# Altium PCB ConcentratorInOne.PcbDoc
Units mil, origin at the board's own origin, x right, y up, seen from the top; angles counter-clockwise.
Board outline 6309.49 x 3868.94 mil, 2 copper layers (Top Layer, Bottom Layer); 142 components, 105 nets, 460 pads, 60 vias.
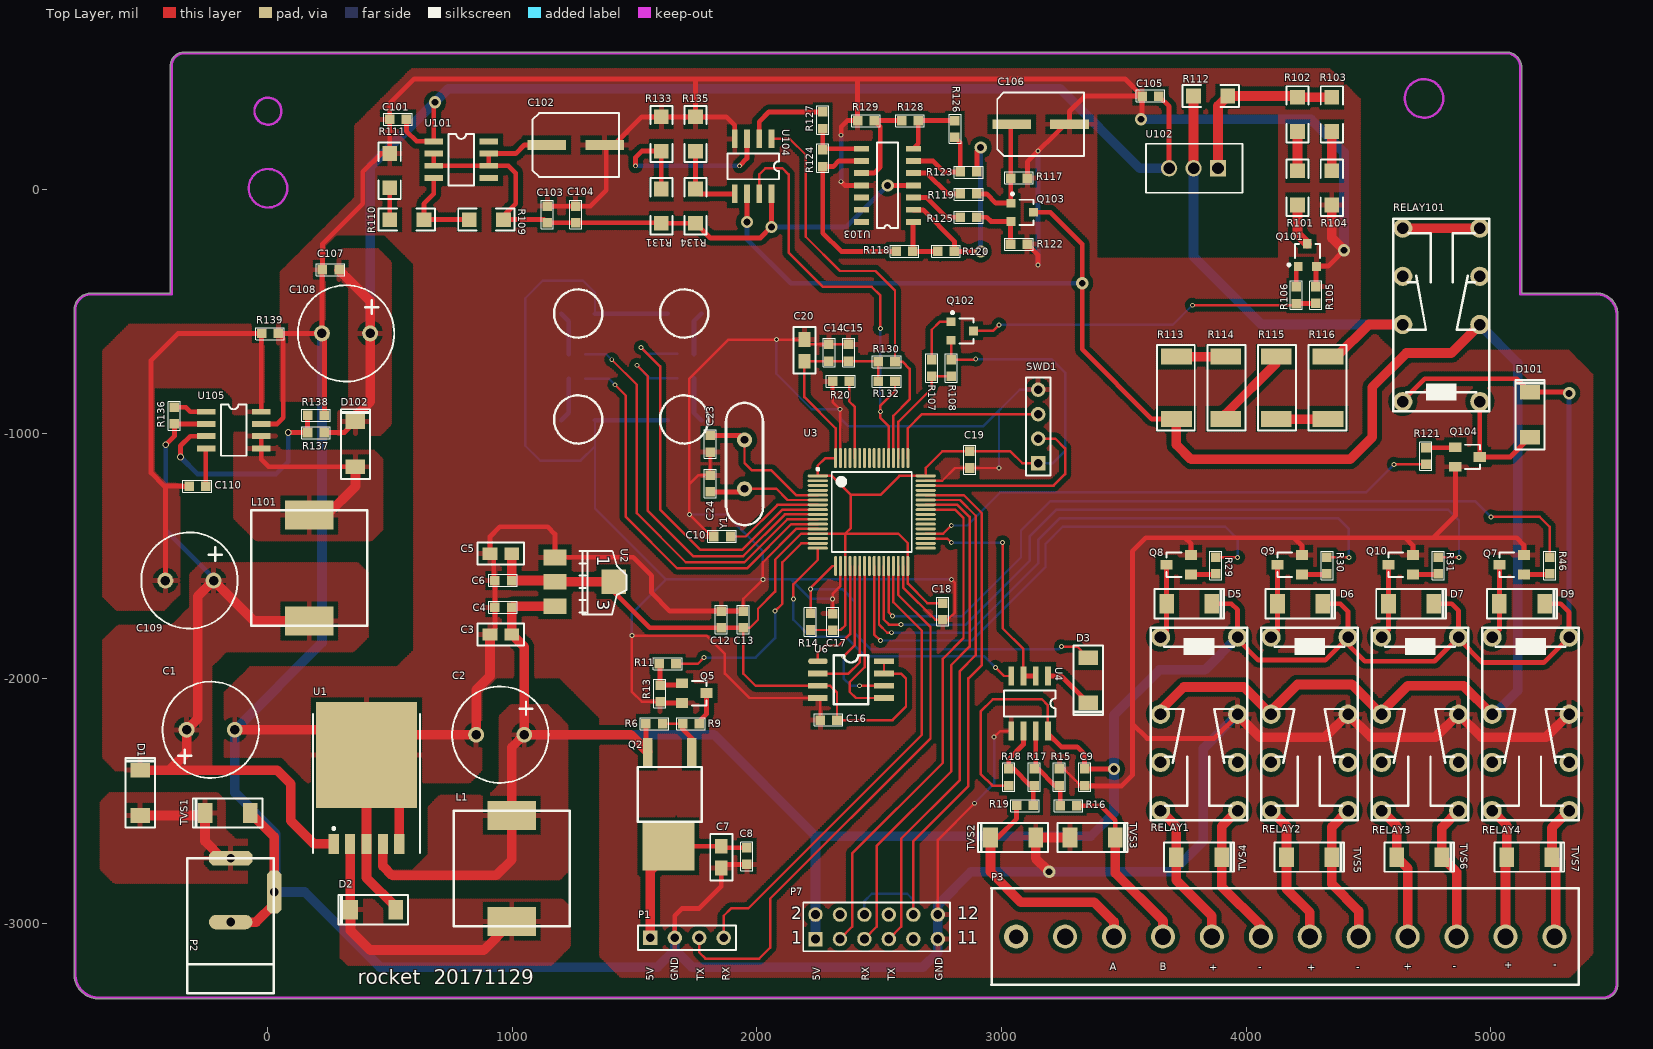
[diagram p0: Top Layer view]
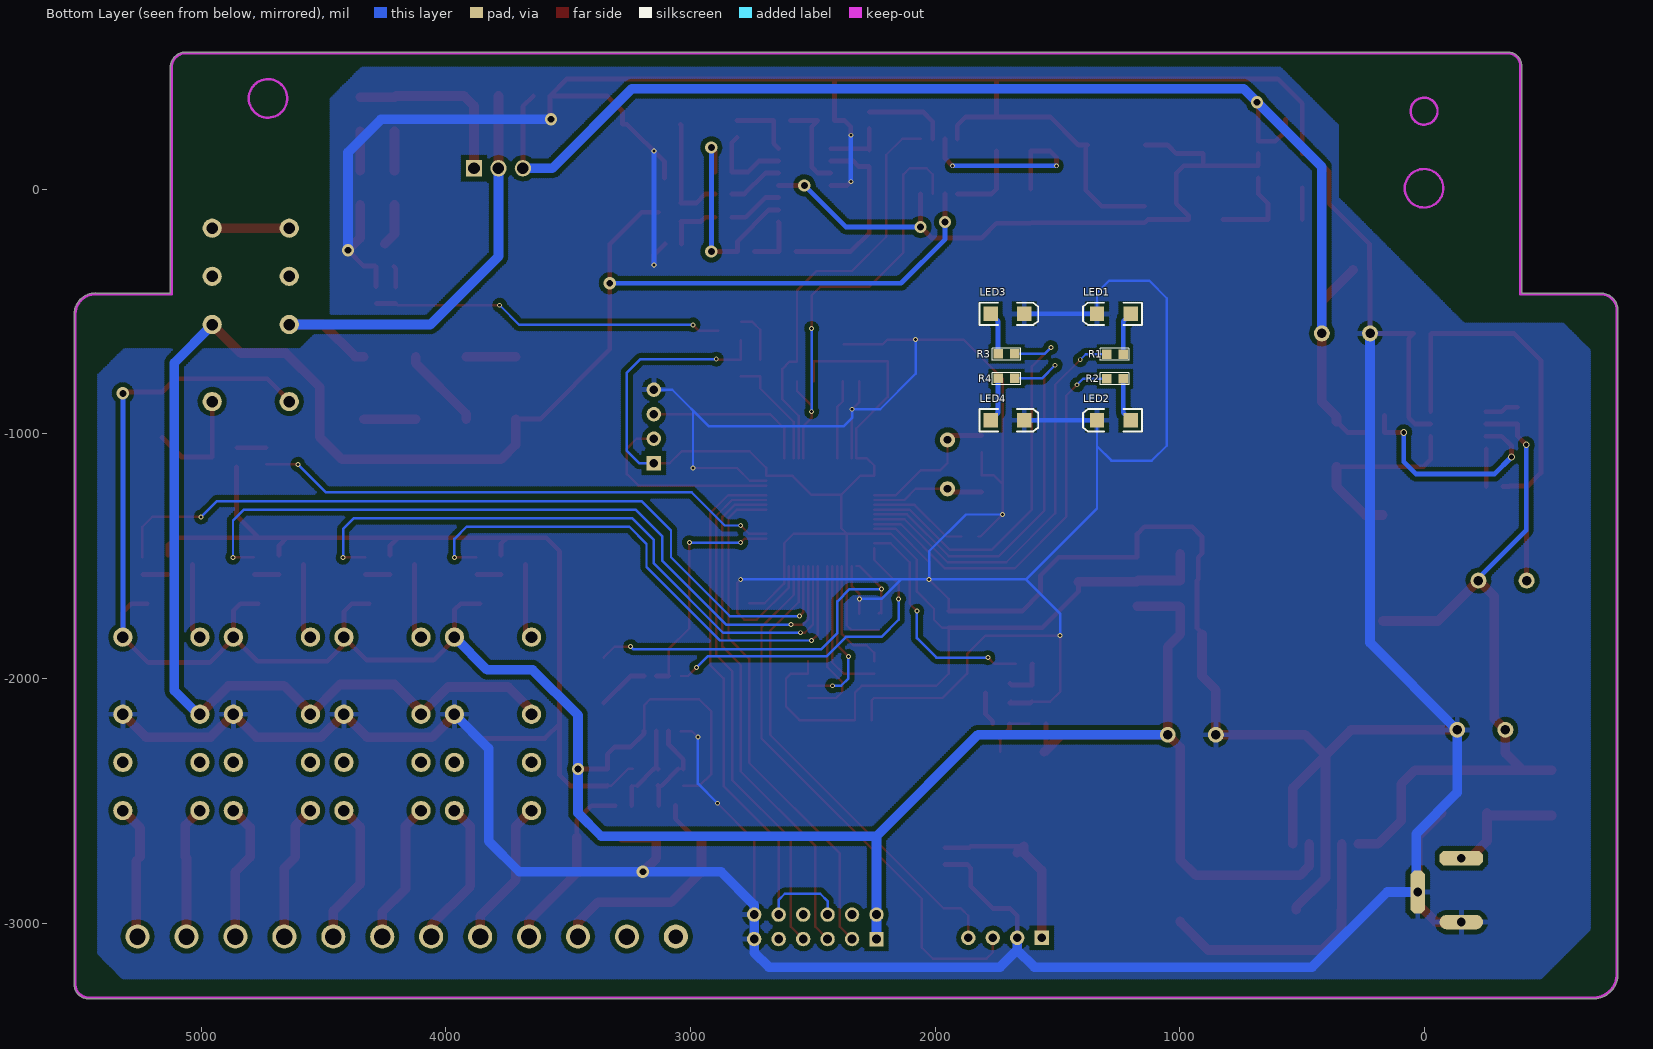
[diagram p1: Bottom Layer view, seen from below]

## Layer stack, top to bottom
Top Layer: signal copper 1.4
Dielectric: dielectric 12.6, FR-4, Dk 4.8
Bottom Layer: signal copper 1.4

## Board outline
-790.01,-495 cw(c-719.94,-494.94) -790.01,-494.94 cw(c-719.94,-494.94) -790.01,-494.86 cw(c-719.94,-494.94) -720,-424.87 cw(c-720,-429.88) -719.11,-424.95 -396.24,-424.95 -396.24,503.07 cw(c-391.3,503.07) -396.18,503.83 cw(c-391.3,505) -396.31,505.1 cw(c-340.96,504.04) -339.96,559.39 cw(c-340.96,504.04) -339.9,559.38 -340,559.39 5055.83,559.39 cw(c5063.39,497.76) 5124.65,507.83 cw(c5120.51,505) 5125.53,505 5125.53,-424.87 5429.94,-424.87 cw(c5432.05,-512.05) 5434.21,-424.87 ccw(c5434.09,-429.88) 5434.09,-424.87 5434.22,-424.87 cw(c5432.05,-512.05) 5519.23,-509.87 cw(c5514.21,-510) 5519.23,-510 5519.23,-3244.45 cw(c5460.16,-3249.84) 5519.47,-3249.84 cw(c5460.16,-3249.84) 5454.77,-3308.91 -684.85,-3308.91 cw(c-690.55,-3209.45) -790.01,-3215.29 cw(c-785,-3215) -790.01,-3215 -790.01,-494.88 cw(c-785,-494.88)

## Design rules (kind name [scope] priority, off if disabled: settings)
Clearance Clearance_1 [inpolygon] p1: gap=20
Clearance [All] p2: gap=7.87
ComponentClearance [All] p1: gap=10 collisioncheckmode=3 verticalgap=10
PolygonConnect PolygonConnect_1 [isvia] p1: connectstyle=Direct reliefconductorwidth=10 reliefentries=4 polygonreliefangle="90 Angle"
PolygonConnect [All] p2: connectstyle=Relief reliefconductorwidth=20 reliefentries=4 polygonreliefangle="90 Angle"
RoutingVias [All] p1: holewidth=16 width=32 viastyle="Through Hole" minholewidth=12 minwidth=20 maxholewidth=70 maxwidth=120
SolderMaskExpansion [All] p1: expansion=4
TestPointUsage FabricationTestPointUsage [All] p1: valid=0 allowmultiple=FALSE
Testpoint FabricationTestpoint [All] p1: side=3 testpointundercomponent=TRUE minsize=40 maxsize=100 preferedsize=60 minholesize=0 maxholesize=40 preferedholesize=32 testpointgrid=1 style=297 order=0123456789
Width [All] p1: maxlimit=100 minlimit=7.87 preferedwidth=10 toplayer_minwidth=9.84 bottomlayer_minwidth=9.84 minimp=50.000000 maximp=50.000000 favimp=50.000000
18 further rules are at their usual default settings.

## Classes and differential pairs
component class JunPuMBUS: C101 C102 C103 C104 C105 C106 C107 C108 C109 C110 D101 D102 L101 Q101 Q102 Q103 Q104 R101 R102 R103 R104 R105 R106 R107 R108 R109 R110 R111 R112 R113 R114 R115 R116 R117 R118 R119 R120 R121 R122 R123 R124 R125 R126 R127 R128 R129 R130 R131 R132 R133 R134 R135 R136 R137 R138 R139 RELAY101 U101 U102 U103 U104 U105
component class Concentrator: C1 C2 C3 C4 C5 C6 C7 C8 C9 C10 C12 C13 C14 C15 C16 C17 C18 C19 C20 C23 C24 D1 D2 D3 D5 D6 D7 D9 L1 LED1 LED2 LED3 LED4 P1 P2 P3 P7 Q2 Q5 Q7 Q8 Q9 Q10 R1 R2 R3 R4 R6 R9 R11 R13 R14 R15 R16 R17 R18 R19 R20 R29 R30 R31 R46 RELAY1 RELAY2 RELAY3 RELAY4 SWD1 TVS1 TVS2 TVS3 TVS4 TVS5 TVS6 TVS7 U1 U2 U3 U4 U6 Y1

## Components (designator, comment, footprint, x,y, rotation, side; value= is the part's Value field where it differs from the comment)
C1 "Cap Pol1" "C_DJ - duplicate" -330,-2210 r180 top
C2 "Cap Pol1" "C_DJ - duplicate" 1050,-2230 r0 top
C3 "Cap" 0805 910,-1820 r0 top
C4 "Cap" 0603 930,-1710 r180 top
C5 "Cap" 0805 910,-1490 r0 top
C6 "Cap" 0603 930,-1600 r180 top
C7 "Cap" 0805 1855,-2775 r90 top
C8 "Cap" 0603 1960,-2760 r270 top
C9 "Cap" 0603 3340,-2370 r90 top
C10 "Cap" 0603 1825,-1420 r180 top
C12 "Cap" 0603 1855,-1725 r90 top
C13 "Cap" 0603 1945,-1725 r90 top
C14 "Cap" 0603 2295,-635 r90 top
C15 "Cap" 0603 2375,-635 r90 top
C16 "Cap" 0603 2260,-2170 r180 top
C17 "Cap" 0603 2310,-1735 r90 top
C18 "Cap" 0603 2760,-1760 r270 top
C19 "Cap" 0603 2870,-1140 r270 top
C20 "Cap" 0805 2195,-615 r270 top
C23 "Cap" 0603 1810,-1075 r270 top
C24 "Cap" 0603 1810,-1170 r90 top
C101 "Cap" 0603 500,285 r180 top
C102 "Cap Pol3" C_6.3_5.3 1260,180 r0 top
C103 "Cap" 0603 1144.21,-70 r90 top
C104 "Cap" 0603 1260,-70 r90 top
C105 "Cap" 0603 3575,380 r180 top
C106 "Cap Pol3" C_6.3_5.3 3160,265 r0 top
C107 "Cap" 0603 225,-330 r180 top
C108 "Cap Pol1" "C_DJ - duplicate" 420,-590 r0 top
C109 "Cap Pol1" "C_DJ - duplicate" -220,-1600 r0 top
C110 "Cap" 0603 -320,-1215 r180 top
D1 "Diode 1N4007" M7-4007 -520,-2560 r90 top
D2 "SS34" M7-4007 525,-2945 r180 top
D3 "M7" M7-4007 3355,-1915 r270 top
D5 "M7" M7-4007 3675,-1695 r0 top
D6 "M7" M7-4007 4128.33,-1695 r0 top
D7 "M7" M7-4007 4581.67,-1695 r0 top
D9 "M7" M7-4007 5035,-1695 r0 top
D101 "M7" M7-4007 5160,-1015 r90 top
D102 "SS34" M7-4007 360,-1135 r90 top
L1 "Inductor" L12*12 1235,-2540 r180 top
L101 "Inductor" L12*12 -65,-1785 r0 top
LED1 "LED2" 3.2X1.6X1.1 1270,-510 r0 bottom
LED2 "LED2" 3.2X1.6X1.1 1270,-945 r0 bottom
LED3 "LED2" 3.2X1.6X1.1 1705,-510 r180 bottom
LED4 "LED2" 3.2X1.6X1.1 1705,-945 r180 bottom
P1 "Header 4" HDR1X4 1565,-3060 r0 top
P2 "Header 2" POWER_SOCK -150,-2735 r270 top
P3 "Header 12" P12 3060,-3055 r0 top
P7 "Header 6X2" HDR2X6 2240,-3065 r0 top
Q2 "PMOS-2" 78M05/20 1735,-2300 r180 top
Q5 "2N3904" NPN-PNP 1695,-2020 r270 top
Q7 "2N3904" NPN-PNP 5135,-1575 r90 top
Q8 "2N3904" NPN-PNP 3775,-1575 r90 top
Q9 "2N3904" NPN-PNP 4228.33,-1575 r90 top
Q10 "2N3904" NPN-PNP 4681.67,-1575 r90 top
Q101 "NPN" SOT-23 4250,-270 r0 top
Q102 "PNP" SOT-23 2840,-580 r270 top
Q103 "BAW56" SOT-23 3085,-95 r270 top
Q104 "2N3904" NPN-PNP 4855,-1055 r270 top
R1 "Res2" 0603 1300,-675 r0 bottom
R2 "Res2" 0603 1300,-775 r0 bottom
R3 "Res2" 0603 1675,-674 r180 bottom
R4 "Res2" 0603 1675,-774 r180 bottom
R6 "Res2" 0603 1615,-2185 r0 top
R9 "Res2" 0603 1765,-2185 r0 top
R11 "Res2" 0603 1670,-1940 r0 top
R13 "Res2" 0603 1605,-2095 r270 top
R14 "Res2" 0603 2220,-1802 r270 top
R15 "Res2" 0603 3236.67,-2370 r90 top
R16 "Res2" 0603 3240,-2520 r180 top
R17 "Res2" 0603 3133.33,-2370 r90 top
R18 "Res2" 0603 3030,-2370 r90 top
R19 "Res2" 0603 3130,-2519 r0 top
R20 "Res2" 0603 2310,-786 r180 top
R29 "Res2" 0603 3875,-1505 r90 top
R30 "Res2" 0603 4330,-1505 r90 top
R31 "Res2" 0603 4785,-1505 r90 top
R46 "Res2" 0603 5240,-1505 r90 top
R101 "Res1" 1206 4210,5 r270 top
R102 "Res1" 1206 4210,305 r270 top
R103 "Res1" 1206 4350,305 r90 top
R104 "Res1" 1206 4350,5 r90 top
R105 "Res1" 0603 4285,-467 r270 top
R106 "Res1" 0603 4205,-400 r90 top
R107 "Res1" 0603 2715,-765 r270 top
R108 "Res1" 0603 2795,-765 r270 top
R109 "Res1" 1206 895,-125 r180 top
R110 "Res1" 1206 570,-125 r180 top
R111 "Res1" 1206 500,75 r90 top
R112 "Res1" 1206 3855,380 r0 top
R113 "Res1" 2512 3715,-940.12 r90 top
R114 "Res1" 2512 3916.67,-685 r270 top
R115 "Res1" 2512 4123.33,-685 r270 top
R116 "Res1" 2512 4335,-940.12 r90 top
R117 "Res1" 0603 3038,45 r180 top
R118 "Res1" 0603 2570,-255 r180 top
R119 "Res1" 0603 2900,-20 r0 top
R120 "Res1" 0603 2740,-255 r180 top
R121 "Res2" 0603 4735,-1125 r270 top
R122 "Res1" 0603 3105,-225 r0 top
R123 "Res1" 0603 2900,70 r0 top
R124 "Res1" 0603 2270,160 r90 top
R125 "Res1" 0603 2900,-115 r0 top
R126 "Res1" 0603 2810,280 r90 top
R127 "Res1" 0603 2270,315 r90 top
R128 "Res1" 0603 2660,280 r0 top
R129 "Res1" 0603 2480,280 r0 top
R130 "Res1" 0603 2565,-705 r0 top
R131 "Res1" 1206 1610,-70 r90 top
R132 "Res1" 0603 2565,-785 r0 top
R133 "104(Good)" 1206 1610,225 r90 top
R134 "Res1" 1206 1750,-70 r90 top
R135 "Res1" 1206 1750,225 r90 top
R136 "Res2" 0603 -380,-960 r270 top
R137 "Res2" 0603 232,-995 r0 top
R138 "Res2" 0603 165,-925 r180 top
R139 "Res2" 0603 45,-590 r0 top
RELAY1 "Relay-DPDT" Relay-DPDP 3965,-2540 r180 top
RELAY2 "Relay-DPDT" Relay-DPDP 4416.67,-2540 r180 top
RELAY3 "Relay-DPDT" Relay-DPDP 4868.33,-2540 r180 top
RELAY4 "Relay-DPDT" Relay-DPDP 5320,-2540 r180 top
RELAY101 "Relay-DPDT" Relay-DPDP 4640,-160 r0 top
SWD1 "SWD" HDR1X4 3150,-1120 r90 top
TVS1 "" M7-4007 -70,-2550 r180 top
TVS2 "" M7-4007 3140,-2650 r180 top
TVS3 "" M7-4007 3280,-2650 r0 top
TVS4 "" M7-4007 3715,-2730 r0 top
TVS5 "" M7-4007 4165,-2730 r0 top
TVS6 "" M7-4007 4615,-2730 r0 top
TVS7 "" M7-4007 5065,-2730 r0 top
U1 "LM2596S-5.0" TO-263-5 405,-2510 r0 top
U2 "AMS1117-3.3" AMS-1117 1175,-1505 r270 top
U3 "STM32F103RBT6" LQFP64_M 2470,-1320 r0 top
U4 "SP485" SOP8 3190,-1990 r180 top
U6 "W25X16" W24X16 2250,-1930 r0 top
U101 "LM317_8" SOP8 680,195 r270 top
U102 "LM317_3" LM317_3 3885,85 r180 top
U103 "LM224A" SOP14 2640,-135 r180 top
U104 "LM393" SOP8 2060,205 r180 top
U105 "AX5203" SOP8 -250,-910 r270 top
Y1 "8M" OSC 1950,-1225 r270 top

## Footprints (in the part's own frame and the unit in brackets; to place one, negate y for a bottom-side part, rotate by r counter-clockwise, add the part's x,y. Pads: shape width x height; smd on the part's side, far side on the other; paste and mask are expansions set on the pad)
3.2X1.6X1.1 [mm] "SMT LED; 2 Flat Leads"
  rect 1.5x1.5 smd: 1(-1.75,0) 2(1.75,0)
  silkscreen extent -2.9,-1.15 3.2,1.15
78M05/20 [mm]
  rect 1x2.9 smd: 1(0,0) 3(4.6,0)
  rect 5.4x5 smd: 2(2.45,9.8)
  silkscreen extent -1,1.57 5.6,7.27
0603 [mil]
  rect 39x39 smd: 1(0,0) 2(-68,0)
  silkscreen extent -92,-25 25,24
0805 [mil]
  rect 60x50 smd: 1(0,0) 2(89.02,0)
  silkscreen extent -51,-45 139,45
1206 [mil]
  rect 60x60 smd: 1(-70,0) 2(70,0)
  silkscreen extent -115,-45 115,45, body extent -75,-35 75,35, height 39
2512 [mm]
  rect 1.65x3.2 smd: 1(0,0) 2(6.48,0)
  silkscreen extent -1.21,-1.91 7.68,2.03
AMS-1117 [mil]
  rect 65x94.49 smd: 1(0,0) 2(100,0) 3(200,0)
  rect 100x100 smd: 4(100,240)
  silkscreen extent -26,100 234,293
C_6.3_5.3 [mm]
  rect 4x1 smd: 1(-3,0) 2(3,0)
  silkscreen extent -4.5,-3.3 4.5,3.3
"C_DJ - duplicate" [mil]
  round 65 hole 39: 1(0,0) 2(-196.85,0)
  silkscreen extent -295,-197 98,197
HDR1X4 [mm] "Connector; Header; 4 Position"
  rect 1.5x1.5 hole 0.9: 1(0,0)
  round 1.5 hole 0.9: 2(2.54,0) 3(5.08,0) 4(7.62,0)
  silkscreen extent -1.27,-1.27 8.89,1.27
HDR2X6 [mm] "Connector; Header; 6x2 Position"
  rect 1.5x1.5 hole 0.9: 1(0,0)
  round 1.5 hole 0.9: 2(0,2.54) 3(2.54,0) 4(2.54,2.54) 5(5.08,0) 6(5.08,2.54) 7(7.62,0) 8(7.62,2.54) 9(10.16,0) 10(10.16,2.54) 11(12.7,0) 12(12.7,2.54)
  silkscreen extent -1.27,-1.27 13.97,3.81
L12*12 [mm]
  rect 5x3 smd: 1(6,11.5) 2(6,0.5)
  silkscreen extent 0,0 12,12
LM317_3 [mm]
  rect 1.7x1.7 hole 1.2: 1(0,0)
  round 1.7 hole 1.2: 2(2.54,0) 3(5.08,0)
  silkscreen extent -2.54,-2.54 7.49,2.54
LQFP64_M [mm] "Thin QFP, 64-Leads, Body 10x10mm, Pitch 0.5mm, IPC Low Density"
  oval 2.1x0.3 smd: 1(-5.6,3.75) 2(-5.6,3.25) 3(-5.6,2.75) 4(-5.6,2.25) 5(-5.6,1.75) 6(-5.6,1.25) 7(-5.6,0.75) 8(-5.6,0.25) 9(-5.6,-0.25) 10(-5.6,-0.75) 11(-5.6,-1.25) 12(-5.6,-1.75) 13(-5.6,-2.25) 14(-5.6,-2.75) 15(-5.6,-3.25) 16(-5.6,-3.75) 33(5.6,-3.75) 34(5.6,-3.25) 35(5.6,-2.75) 36(5.6,-2.25) 37(5.6,-1.75) 38(5.6,-1.25) 39(5.6,-0.75) 40(5.6,-0.25) 41(5.6,0.25) 42(5.6,0.75) 43(5.6,1.25) 44(5.6,1.75) 45(5.6,2.25) 46(5.6,2.75) 47(5.6,3.25) 48(5.6,3.75)
  oval 0.3x2.1 smd: 17(-3.75,-5.6) 18(-3.25,-5.6) 19(-2.75,-5.6) 20(-2.25,-5.6) 21(-1.75,-5.6) 22(-1.25,-5.6) 23(-0.75,-5.6) 24(-0.25,-5.6) 25(0.25,-5.6) 26(0.75,-5.6) 27(1.25,-5.6) 28(1.75,-5.6) 29(2.25,-5.6) 30(2.75,-5.6) 31(3.25,-5.6) 32(3.75,-5.6) 49(3.75,5.6) 50(3.25,5.6) 51(2.75,5.6) 52(2.25,5.6) 53(1.75,5.6) 54(1.25,5.6) 55(0.75,5.6) 56(0.25,5.6) 57(-0.25,5.6) 58(-0.75,5.6) 59(-1.25,5.6) 60(-1.75,5.6) 61(-2.25,5.6) 62(-2.75,5.6) 63(-3.25,5.6) 64(-3.75,5.6)
  silkscreen extent -5.72,-4.15 4.15,4.57, body extent -5,-5 5,5, height 1.6
M7-4007 [mil]
  rect 60x80 smd: 1(0,0) 2(185,0)
  silkscreen extent -50,-60 235,60
NPN-PNP [mil]
  rect 40x50 smd: B(0,0) C(40,100) E(80,0)
  silkscreen extent -10,40 90,100
OSC [mil]
  round 62 hole 31: 1(0,0) 2(-200,0)
  silkscreen extent -351,-75 149,76
P12 [mm]
  round 2.5 hole 1.5: 1(0,0)
  round 2.5 hole 1.7: 2(5.08,0) 3(10.16,0) 4(15.24,0) 5(20.32,0) 6(25.4,0) 7(30.48,0) 8(35.56,0) 9(40.64,0) 10(45.72,0) 11(50.8,0) 12(55.88,0)
  silkscreen extent -2.56,-5 58.42,5.02
POWER_SOCK [mil]
  oct 60x177.17 hole 36: 1(0,0)
  oval 60x177.17 hole 36: 2(260.83,0)
  oct 177.17x60 hole 36: 3(137.8,178.15)
  silkscreen extent 0,-177 551,177
Relay-DPDP [mm]
  round 2 hole 1.2: 1(0,-10) 2(0,-5) 3(0,0) 4(8,-10) 5(8,-5) 6(8,0) 7(0,-18) 8(8,-18)
  silkscreen extent -1,-19 9,1
SOP8 [mil]
  rect 24x76 smd: 1(0,0) 2(50,0) 3(100,0) 4(150,0) 5(150,225) 6(100,225) 7(50,225) 8(0,225)
  silkscreen extent -30,60 180,165
SOP14 [mm]
  rect 1.55x0.6 smd: 1(0,0) 2(0,-1.27) 3(0,-2.54) 4(0,-3.81) 5(0,-5.08) 6(0,-6.35) 7(0,-7.62) 8(5.4,-7.62) 9(5.4,-6.35) 10(5.4,-5.08) 11(5.4,-3.81) 12(5.4,-2.54) 13(5.4,-1.27) 14(5.4,0)
  silkscreen extent 1.61,-8.25 3.79,0.64
SOT-23 [mm]
  rect 0.9x0.95 smd: 1(0,1.175) 2(-0.95,-1.175) 3(0.95,-1.175)
  silkscreen extent -2.03,-1.14 1.3,1.18
TO-263-5 [mm]
  rect 1.05x2.1 smd: 1(-3.4,-4.225) 2(-1.7,-4.225) 3(0,-4.225) 4(1.7,-4.225) 5(3.4,-4.225)
  rect 10.5x11 smd: 6(0,4.987)
  silkscreen extent -5.55,-5.18 5.55,9.28, body extent -5.33,-4.7 5.33,10.29, height 3
W24X16 [mil]
  oval 80x24 smd: 1(0,0)
  rect 80x24 smd: 2(0,-50.06) 3(0,-100.06) 4(0,-150.06) 5(270,-150) 6(270,-100) 7(270,-50) 8(270,0)
  silkscreen extent 65,-175 205,25

## Part data
C1 C2 C108 C109: "Polarized Capacitor (Radial)"
C3 C4 C5 C6 C7 C8 C9 C10 C12 C13 C14 C15 C16 C17 C18 C19 C20 C23 C24 C101 C103 C104 C105 C107 C110: "Capacitor"
C102 C106: "Polarized Capacitor (Surface Mount)"
D1: "1 Amp General Purpose Rectifier"
D2 D3 D5 D6 D7 D9 D101 D102: library part "Diode 1N4007", "1 Amp General Purpose Rectifier"
LED1 LED2 LED3 LED4: "Typical RED, GREEN, YELLOW, AMBER GaAs LED"
P1: "Header, 4-Pin"
P2: "Header, 2-Pin"
P3: library part "Header 14", "Header, 14-Pin"
P7: "Header, 6-Pin, Dual row"
Q2: "P-Channel Power MOSFET"
Q5 Q7 Q8 Q9 Q10 Q101 Q104: "NPN General Purpose Amplifier"
Q102: "PNP Bipolar Transistor"
R1 R2 R3 R4 R6 R9 R11 R13 R14 R15 R16 R17 R18 R19 R20 R29 R30 R31 R46 R101 R102 R103 R104 R105 R106 R107 R108 R109 R110 R111 R112 R113 R114 R115 R116 R117 R118 R119 R120 R121 R122 R123 R124 R125 R126 R127 R128 R129 R130 R131 R132 R134 R135 R136 R137 R138 R139: "Resistor"
R133: library part Res1, "Resistor"
RELAY1 RELAY2 RELAY3 RELAY4 RELAY101: "Dual-Pole Dual-Throw Relay"
SWD1: library part "Header 4", "Header, 4-Pin"
TVS1 TVS2 TVS3 TVS4 TVS5 TVS6 TVS7: library part "D Zener", "Zener Diode"
U1: "5V稳压芯片"
U3: "STM32 ARM-based 32-bit MCU with 128 Kbytes Flash, 64-pin LQFP, Industrial Temperature"
U4: library part Pro55.tmp_SP485_20
U6: library part W24X16
Y1: library part XTAL, "Crystal Oscillator"

## Via types
v1: diameter 20, hole 12, Top Layer to Bottom Layer, 45 vias
v2: diameter 50, hole 28, Top Layer to Bottom Layer, 12 vias
v3: diameter 27.56, hole 19.68, Top Layer to Bottom Layer, 3 vias

## Nets (pads, with @x,y where several pads share a name; then routed paths per layer and width w, separated by ;. In a path a pad name is that pad's centre, name@x,y a point inside that pad or via, vN(x,y) a via of type N, cw(c..) or ccw(c..) an arc to the next point about the centre after c; other vN are vias at no path point)
485_CTRL2: U3.35 U4.2 U4.3 | length 951.7
  Top Layer w10: U3.35 2778.27,-1428.27 v1(2795,-1445) ; v1(3005,-1445) 3005,-1795 3090,-1880 U4.3
  Top Layer w19.68: U4.3 U4.2
  Bottom Layer w10: v1(2795,-1445) v1(3005,-1445)
485A2: P3.3 R19.2 TVS2.2 | length 982.8
  Top Layer w19.68: TVS2.2 2985,-2650 3062,-2573 R19.2
  Top Layer w39.37: TVS2.2 2955,-2790 3080,-2915 3380,-2915 3460,-2995 P3.3
485B2: P3.4 R16.2 TVS3.2 | length 737.6
  Top Layer w19.68: R16.2 3405,-2520 3465,-2580 TVS3.2
  Top Layer w39.37: TVS3.2 3465,-2795 3660,-2990 P3.4
BUS+1: P3.5 RELAY1.6 TVS4.1 | length 602
  Top Layer w39.37: RELAY1.6 3715,-2604.96 3715,-2825 3860,-2970 P3.5
BUS+2: P3.7 RELAY2.6 TVS5.1 | length 580.6
  Top Layer w39.37: RELAY2.6 4165,-2603.29 4165,-2860 4260,-2955 P3.7
BUS+3: P3.9 RELAY3.6 TVS6.1 | length 559.2
  Top Layer w39.37: RELAY3.6 4615,-2601.63 TVS6.1 4660,-2775 P3.9
BUS+4: P3.11 RELAY4.6 TVS7.1 | length 534.8
  Top Layer w39.37: RELAY4.6 5065,-2599.96 TVS7.1 ; P3.11 TVS7.1@5060,-2735
BUS-1: P3.6 RELAY1.3 TVS4.2 | length 608.2
  Top Layer w39.37: RELAY1.3 3900,-2605 3900,-2850 4060,-3010 P3.6
BUS-2: P3.8 RELAY2.3 TVS5.2 | length 588.2
  Top Layer w39.37: RELAY2.3 4350,-2606.67 4350,-2840 4460,-2950 P3.8
BUS-3: P3.10 RELAY3.3 TVS6.2 | length 568.2
  Top Layer w39.37: P3.10 4860,-2790 TVS6.2 4800,-2608.33 RELAY3.3
BUS-4: P3.12 RELAY4.3 TVS7.2 | length 539
  Top Layer w39.37: TVS7.2 5250,-2610 RELAY4.3 ; P3.12@5265,-3065 TVS7.2@5265,-2745
DELAY_1: R29.1 U3.25 | length 2208.9
  Top Layer w10: U3.25 2479.84,-1819.84 v1(2505,-1845) ; R29.1 v1(3965,-1505)
  Bottom Layer w10: v1(2505,-1845) 2880,-1845 3180,-1545 3180,-1450 3250,-1380 3915,-1380 3965,-1430 v1(3965,-1505)
DELAY_2: R30.1 U3.26 | length 2646.6
  Top Layer w10: U3.26 2499.53,-1779.53 2533.13,-1813.13 v1(2550.61,-1813.13) ; R30.1 v1(4420,-1505)
  Bottom Layer w10: v1(2550.61,-1813.13) 2866.87,-1813.13 3150,-1530 3150,-1435 3240,-1345 4375,-1345 4420,-1390 v1(4420,-1505)
DELAY_3: R31.1 U3.27 | length 3085
  Top Layer w10: U3.27 2519.21,-1759.21 2540,-1780 v1(2590,-1780) ; R31.1 v1(4870,-1505)
  Bottom Layer w10: v1(2590,-1780) 2855,-1780 3115,-1520 3115,-1420 3225,-1310 4825,-1310 4870,-1355 v1(4870,-1505)
DELAY_4: R46.1 U3.28 | length 3323.8
  Top Layer w10: U3.28 2538.9,-1728.9 v1(2555,-1745) ; v1(5000,-1340) 5200,-1340 5240,-1380 R46.1
  Bottom Layer w10: v1(2555,-1745) 2840,-1745 3080,-1505 3080,-1395 3200,-1275 4935,-1275 v1(5000,-1340)
GND: C1.2 C2.2 C3.1 C4.1 C5.1 C6.1 C7.1 C8.1 C9.2 C10.1 C12.1 C13.1 C14.1 C15.1 C16.1 C17.1 C18.1 C19.1 C20.1 C23.1 C24.1 C101.1 C102.2 C103.1 C104.1 C105.1 C106.2 C107.1 C108.2 D2.1 LED1.2 LED2.2 LED3.2 LED4.2 P1.2 P2.2 P2.3 P7.11 P7.12 Q5.E Q7.E Q8.E Q9.E Q10.E Q101.3 Q104.E R13.1 R15.1 R20.1 R104.1 R105.2 R111.2 R117.2 R122.1 R129.2 R133.2 R135.2 R138.2 R139.1 RELAY1.1 RELAY2.1 RELAY3.1 RELAY4.1 SWD1.4 TVS1.1 TVS2.1 TVS3.1 U1.3 U1.5 U1.6 U2.1 U3.12 U3.18 U3.31 U3.47 U3.63 U4.5 U6.4 U103.11 U104.4 U105.7 | length 41312.7
  Top Layer w10: R13.1 1530,-2095 1490,-2055 v1(1490,-1825) 1795,-1825 1870,-1900 1870,-1980 1970.06,-2080.06 U6.4 2260,-2090.06 C16.1 ; 1725,-1205 1760,-1170 C24.1 C23.1 ; C10.1 1815,-1420 v1(1725,-1330) 1725,-775 1885,-615 C20.1 2215,-635 C15.1 ; C13.1 1945,-1675 v1(2025,-1595) 2025,-1525 2161.1,-1388.9 U3.12 ; C17.1 2310,-1655 2342.05,-1622.95 U3.18 ; R20.1 2310,-870 2342.05,-902.05 U3.63 ; U3.31 2597.95,-1627.95 2730,-1760 2780,-1760 2810,-1730 2810,-1610.57 v1(2795,-1595.57) ; U3.47 2757.95,-1192.05 2810,-1140 v1(2990,-1140) ; P7.12 2740,-2660 v1(2890,-2510) ; v1(2970,-2240) 2995,-2215 U4.5 ; R15.1 3255,-2370 3323,-2438 C9.2 ; 4855,-1255 Q104.E
  Top Layer w19.68: U105.7 40,-960 65,-935 65,-610 R139.1 C108.2 ; C107.1@223.15,-331.85 C108.2 ; C107.1 225,-225 390,-60 390,70 465,145 R111.2 500,350 600,450 3505,450 C105.1 ; R138.2 233,-599.85 C108.2 ; C3.1 910,-1815 930,-1795 C6.1 925,-1595 925,-1505 C5.1 910,-1420 950,-1380 1145,-1380 1175,-1410 U2.1 1495,-1505 1570,-1580 1570,-1650 1645,-1725 C13.1 ; C103.1 1320,-70 1385,-5 C102.2@1385,180 ; C102.2 1415,180 1530,295 1875,295 1910,260 U104.4 ; R13.1 1610,-2100 Q5.E Q5.E@1690,-2095 ; P1.2 1665,-2970 1695,-2940 1765,-2940 1855,-2850 C7.1 1870,-2760 C8.1 ; R135.2 1750,450 ; v1(2345,30) 2360,15 U103.11 ; v1(2345,220) 2345,255 2370,280 R129.2 2412,448 2410,450 ; R122.1 3150,-270 v1(3150,-310) ; R117.2 3106,111 3260,265 C106.2 3278.11,318.11 3340,380 C105.1 ; C9.2 3342,-2440 3490,-2440 3535,-2395 3535,-1480 3590,-1425 5105,-1425 5135,-1455 Q7.E ; 3535,-2185 3595,-2245 3870,-2245 RELAY1.1@3965,-2150 ; v2(3570,285) 3575,290 C105.1 ; 3750,-1425 3775,-1450 Q8.E ; 4195,-1425 4228.33,-1458.33 Q9.E ; R105.2 4285,-318.66 4288.66,-315 4335,-315 v2(4400,-250) ; 4650,-1425 4681.67,-1456.67 Q10.E ; 4765,-1425 4855,-1335 Q104.E
  Top Layer w39.37: P2.2 -45.83,-2995.83 28.15,-2921.85 28.15,-2648.15 TVS1.1 ; C1.2 301.34,-2210 538.86,-2447.52 U1.5 ; D2.1 525,-2935 405,-2815 U1.6 488.66,-2230 C2.2 853.15,-2046.85 910,-1990 C3.1 ; v2@3190,-2785 3140,-2735 TVS2.1 TVS3.1 ; RELAY1.1 3965,-2150 4055,-2240 4322.97,-2240 RELAY2.1 4416.67,-2146.67 4510,-2240 4774.63,-2240 RELAY3.1 4962.03,-2240 5226.3,-2240 RELAY4.1 ; R104.1 4350,-200 v2(4400,-250)
  Bottom Layer w10: 1338.9,-1051.1 1280,-1110 1115,-1110 1053.93,-1048.93 1053.93,-446.07 1125,-375 1290,-375 1338.9,-423.9 LED1.2 ; LED2.2 1338.9,-1305.04 1629.43,-1595.57 ; v1(1490,-1825) 1490,-1735 1629.43,-1595.57 ; v1(1725,-1330) 1875,-1330 2025,-1480 v1(2025,-1595) ; v1(2080,-615) 2080,-755 2225,-900 v1(2340,-900) 2340,-935 2375,-970 2925,-970 3075,-820 SWD1.4 ; 2140.57,-1595.57 2220,-1675 v1(2310,-1675) ; v1(2795,-1595.57) 1629.43,-1595.57 ; v1(2890,-2510) 2970,-2430 v1(2970,-2240) ; v1(2990,-1140) 2990,-905
  Bottom Layer w19.68: C108.2 C108.2@240,-590 ; LED2.2 LED4.2 ; LED1.2 LED3.2 ; v1(2345,30) v1(2345,220) ; v1(3150,-310) v1(3150,155)
  Bottom Layer w39.37: P2.3 152.8,-2872.8 460,-3180 1595,-3180 1665,-3110 ; P2.3@35,-2885 35,-2635 -133.15,-2466.85 C1.2 223.15,-1853.7 C108.2 ; P1.2 1665,-3110 ; v2(3570,285) 4265,285 4400,150 v2(4400,-250) ; RELAY1.1 3825,-2286.3 3825,-2665 3700,-2790 2875,-2790 2740,-2925 2740,-3120 2680,-3180 1735,-3180 1665,-3110
  other v2: 3195,-2790
GPRS_RX: P7.5 U3.42 | length 2103.2
  Top Layer w10: P7.5 2490,-3015 2490,-2685 2795,-2380 2795,-1945 2870,-1870 2870,-1340 2820.47,-1290.47 U3.42
GPRS_TX: P7.7 U3.43 | length 2108.2
  Top Layer w10: P7.7 2590,-3015 2590,-2655 2830,-2415 2830,-1970 2895,-1905 2895,-1335 2830.79,-1270.79 U3.43
GPRSPWR_CTRL: P7.3 U3.41 | length 2098.1
  Top Layer w10: P7.3 2390,-3015 2390,-2715 2760,-2345 2760,-1920 2845,-1835 2845,-1345 2810.16,-1310.16 U3.41
GPRSPWRKEY: P7.6 P7.10 U3.44 | length 2353.9
  Top Layer w10: P7.10 2640,-2665 2865,-2440 2865,-2000 2920,-1945 2920,-1325 2846.1,-1251.1 U3.44
  Bottom Layer w10: P7.6 2440,-2910 2470,-2880 2615,-2880 2640,-2905 P7.10
LED1: R1.1 U3.10 | length 1681.8
  Top Layer w10: v1(1407.5,-697.5) 1510,-800 1510,-1325 1710,-1525 1950,-1525 2125.47,-1349.53 U3.10
  Bottom Layer w10: R1.1 1385,-675 v1(1407.5,-697.5)
LED2: R2.1 U3.11 | length 1635.4
  Top Layer w10: v1(1420,-800) 1465,-845 1465,-1340 1675,-1550 1960,-1550 2140.79,-1369.21 U3.11
  Bottom Layer w10: R2.1 1395,-775 v1(1420,-800)
LED3: R3.1 U3.8 | length 1634.2
  Top Layer w10: v1(1527.5,-647.5) 1605,-725 1605,-1310 1770,-1475 1940,-1475 2104.84,-1310.16 U3.8
  Bottom Layer w10: v1(1527.5,-647.5) 1554,-674 R3.1
LED4: R4.1 U3.9 | length 1642.6
  Top Layer w10: v1(1510,-720) 1555,-765 1555,-1315 1740,-1500 1945,-1500 2115.16,-1329.84 U3.9
  Bottom Layer w10: v1(1510,-720) 1564,-774 R4.1
LORA_5V: C7.2 C8.2 P1.1 Q2.2 | length 766
  Top Layer w19.68: Q2.2 C7.2@1855,-2685.83 ; C7.2 1861.02,-2692 C8.2
  Top Layer w39.37: P1.1 1565,-2785 1638.54,-2711.46 Q2.2 Q2.2@1665,-2712.28
LORA_RX: P1.4 U3.29 | length 1944.3
  Top Layer w10: P1.4 1865,-2970 1895,-2940 1965,-2940 2675,-2230 2675,-1805 2558.58,-1688.58 U3.29
LORA_TX: P1.3 U3.30 | length 2264.4
  Top Layer w10: P1.3 1765,-3120 1790,-3145 2010,-3145 2055,-3100 2055,-2900 2710,-2245 2710,-1790 2578.27,-1658.27 U3.30
LORAPOW_CTRL: R11.1 U3.15 | length 947.4
  Top Layer w10: R11.1 1760,-1940 v1(1785,-1915) ; v1(2075,-1725) 2105,-1695 2105,-1525 2182.05,-1447.95 U3.15
  Bottom Layer w10: v1(1785,-1915) 1995,-1915 2075,-1835 v1(2075,-1725)
M+: Q103.1 R113.1 RELAY1.4 RELAY2.4 RELAY3.4 RELAY4.4 RELAY101.4 U104.6 | length 7905.3
  Top Layer w19.68: v2(1960,-135) U104.6 ; Q103.1 3200,-95 3330,-225 3330,-655 3615.12,-940.12 R113.1
  Top Layer w39.37: RELAY1.4 3650.04,-2129.96 3745,-2035 3990.41,-2035 RELAY2.4 4101.71,-2133.29 4210,-2025 4432.07,-2025 RELAY3.4 4553.37,-2136.63 4660,-2030 4888.74,-2030 RELAY4.4 ; R113.1 3715,-1045 3775,-1105 4425,-1105 4515,-1015 4515,-810 4655,-670 4838.66,-670 RELAY101.4
  Bottom Layer w19.68: v2(1960,-135) 1960,-205 2140,-385 v2(3330,-385)
  Bottom Layer w39.37: RELAY101.4@4954.33,-554.33 5110,-710 5110,-2050 5013.7,-2146.3 RELAY4.4
NetC10_2: C10.2 U3.7 | length 410.2
  Top Layer w10: C10.2 1955,-1420 2084.53,-1290.47 U3.7
NetC23_2: C23.2 U3.5 Y1.2 | length 596.3
  Top Layer w10: Y1.2 1950,-1120 1980,-1150 2060,-1150 2161.1,-1251.1 U3.5
  Top Layer w19.68: C23.2 1932,-1007 Y1.2
NetC24_2: C24.2 U3.6 Y1.1 | length 463.9
  Top Layer w10: Y1.1 2080,-1225 2125.79,-1270.79 U3.6
  Top Layer w19.68: C24.2 1937,-1238 Y1.1
NetC106_1: C106.1 Q103.2 R117.1 R119.1 | length 478.8
  Top Layer w19.68: R119.1 2940,-20 2977.6,-57.6 Q103.2 3038,-56.86 3038,261.11 C106.1
NetC110_2: C110.2 U105.4 | length 153
  Top Layer w19.68: C110.2 U105.4@-252,-1062
NetD2_2: D2.2 L1.1 U1.2 | length 1094.2
  Top Layer w39.37: D2.2@338.07,-2943.07 U1.2 ; D2.2 340,-3030 420,-3110 885,-3110 998.78,-2996.22 L1.1
NetD3_2: D3.2 U4.1 | length 210.6
  Top Layer w19.68: U4.1 3245,-1990 D3.2
NetD5_1: D5.1 Q8.C RELAY1.8 | length 306.7
  Top Layer w19.68: RELAY1.8 3675,-1806.38 Q8.C
NetD6_1: D6.1 Q9.C RELAY2.8 | length 307.4
  Top Layer w19.68: RELAY2.8 4128.33,-1804.71 Q9.C
NetD7_1: D7.1 Q10.C RELAY3.8 | length 308.1
  Top Layer w19.68: RELAY3.8 4581.67,-1803.04 Q10.C
NetD9_1: D9.1 Q7.C RELAY4.8 | length 308.7
  Top Layer w19.68: RELAY4.8 5035,-1801.38 Q7.C
NetD101_1: D101.1 Q104.C RELAY101.8 | length 469.4
  Top Layer w10: Q104.C Q104.C@4955,-1090
  Top Layer w19.68: Q104.C@4954.96,-1094.96 RELAY101.8 ; Q104.C 5080,-1095 D101.1
NetD102_1: D102.1 L101.1 U105.5 U105.6 | length 809.8
  Top Layer w19.68: U105.6 -25,-1105 5,-1135 D102.1
  Top Layer w39.37: L101.1 242.76,-1332.24 360,-1215 D102.1
NetLED1_1: LED1.1 R1.2 | length 177.8
  Bottom Layer w19.68: LED1.1 1232,-540.9 R1.2
NetLED2_1: LED2.1 R2.2 | length 182.8
  Bottom Layer w19.68: LED2.1 1232,-914.1 R2.2
NetLED3_1: LED3.1 R3.2 | length 176.8
  Bottom Layer w19.68: R3.2 1743,-540.9 LED3.1
NetLED4_1: LED4.1 R4.2 | length 183.8
  Bottom Layer w19.68: R4.2 1743,-914.1 LED4.1
NetQ2_1: Q2.1 R6.1 R9.2 | length 288.5
  Top Layer w10: R6.1 R9.2 1697,-2207 1735,-2245 Q2.1
  Top Layer w19.68: R9.2 1697,-2207 Q2.1@1735,-2245
NetQ5_B: Q5.B R11.2 R13.2 | length 181.1
  Top Layer w19.68: R11.2 1605,-1943 R13.2 1688,-2027 Q5.B
NetQ5_C: Q5.C R9.1 | length 137.4
  Top Layer w19.68: R9.1 1765,-2175 1795,-2145 Q5.C
NetQ7_B: Q7.B R46.2 | length 103
  Top Layer w19.68: Q7.B R46.2@5238,-1575
NetQ8_B: Q8.B R29.2 | length 98
  Top Layer w19.68: Q8.B R29.2@3873,-1575
NetQ9_B: Q9.B R30.2 | length 99.7
  Top Layer w19.68: Q9.B R30.2@4328,-1575
NetQ10_B: Q10.B R31.2 | length 101.3
  Top Layer w19.68: Q10.B R31.2@4783,-1575
NetQ101_1: Q101.1 R101.2 | length 175.3
  Top Layer w39.37: R101.2 4210,-183.74 Q101.1
NetQ101_2: Q101.2 R106.1 | length 86.9
  Top Layer w19.68: R106.1 4205,-323.86 Q101.2
NetQ102_1: Q102.1 R105.1 R106.2 | length 1444.1
  Top Layer w10: Q102.1 2965,-580 v1(2990,-555) ; v1(3780,-475) 4198,-475 R106.2
  Top Layer w19.68: R106.2 R105.1@4284,-468
  Bottom Layer w10: v1(2990,-555) 3700,-555 v1(3780,-475)
NetQ102_2: Q102.2 R107.2 | length 214.2
  Top Layer w10: R107.2 2715,-575 2747.4,-542.6 Q102.2
NetQ103_3: Q103.3 R122.2 R125.1 | length 239.3
  Top Layer w19.68: R125.1 2940,-115 2957.4,-132.4 Q103.3 3037,-134.14 R122.2
NetQ104_B: Q104.B R121.2 | length 118
  Top Layer w19.68: R121.2 Q104.B@4853,-1057
NetR15_2: R15.2 R16.1 R17.1 U4.7 | length 468.8
  Top Layer w10: R17.1 3150,-2370 3218,-2438 R15.2 R15.2@3240,-2441.33
  Top Layer w19.68: R17.1 3140,-2363.33 U4.7 ; R17.1@3150,-2370 R15.2@3218,-2438 ; R16.1 R15.2@3240,-2441.33
NetR17_2: R17.2 R18.1 R19.1 U4.6 | length 489.9
  Top Layer w10: R18.1 3050,-2370 3118,-2438 R17.2
  Top Layer w19.68: R18.1 3030,-2330 3090,-2270 U4.6 ; 3050,-2370 R17.2@3118,-2438 ; R19.1 3130,-2441.33 R17.2
NetR20_2: R20.2 U3.60 | length 323.1
  Top Layer w10: R20.2 2378,-868 2401.1,-891.1 U3.60
NetR101_1: R101.1 R102.2 | length 160
  Top Layer w39.37: R101.1 R102.2
NetR102_1: R102.1 R103.2 R112.2 U102.1 | length 738.6
  Top Layer w39.37: U102.1 3885,340 R112.2 4205,380 R102.1 R103.2
NetR103_1: R103.1 R104.2 | length 160
  Top Layer w39.37: R104.2 R103.1
NetR109_2: R109.2 R110.1 U101.4 | length 371.6
  Top Layer w19.68: U101.4 680,-20 640,-60 R110.1 R109.2
NetR110_2: R110.2 R111.1 | length 130
  Top Layer w19.68: R110.2 R111.1
NetR112_1: R112.1 R116.2 RELAY101.1 U102.2 | length 1984.8
  Top Layer w39.37: U102.2 R112.1 ; R116.2 4370,-685 4501.3,-553.7 RELAY101.1
  Bottom Layer w39.37: U102.2 3785,-275 4063.7,-553.7 RELAY101.1
NetR113_2: R113.2 R114.1 | length 201.7
  Top Layer w39.37: R113.2 R114.1
NetR114_2: R114.2 R115.1 | length 340.7
  Top Layer w39.37: R114.2 3916.67,-918.33 4123.33,-711.67 R115.1
NetR115_2: R115.2 R116.1 | length 211.7
  Top Layer w39.37: R115.2 R116.1
NetR118_1: R118.1 R124.2 U103.9 | length 770
  Top Layer w19.68: U103.9 2335,115 2312,92 R124.2 2270,-180 2345,-255 R118.1
NetR118_2: R118.2 R120.1 U103.1 | length 222.8
  Top Layer w19.68: U103.1 2638,-137 R118.2 R120.1
NetR119_2: R119.2 U103.5 | length 227.2
  Top Layer w19.68: U103.5 2695,65 2780,-20 R119.2
NetR120_2: R120.2 R123.1 U103.2 | length 901.2
  Top Layer w19.68: U103.2 2680,-85 2808,-213 R120.2 v2(2915,-255) ; R123.1 2900,155 v2(2915,170)
  Bottom Layer w19.68: v2(2915,-255) v2(2915,170)
NetR123_2: R123.2 R126.2 U103.6 | length 361.8
  Top Layer w19.68: U103.6 2720,115 2765,70 R123.2 2832,190 R126.2
NetR124_1: R124.1 R127.2 U103.8 | length 239.4
  Top Layer w19.68: R124.1 R127.2 ; R124.1@2275,165 U103.8
NetR125_2: R125.2 U103.3 | length 225.1
  Top Layer w19.68: U103.3 2695,-35 2775,-115 R125.2
NetR126_1: R126.1 R128.1 U103.7 | length 273.3
  Top Layer w19.68: U103.7 2660,185 R128.1 R126.1
NetR127_1: R127.1 U104.2 | length 346.6
  Top Layer w19.68: U104.2 2010,275 2050,315 R127.1
NetR128_2: R128.2 R129.1 U103.10 | length 400.3
  Top Layer w19.68: U103.10 2480,65 2505,90 2505,255 R129.1 R128.2
NetR131_2: R131.2 R133.1 U104.3 | length 852.8
  Top Layer w19.68: v1(1505,95) 1505,130 1530,155 R133.1 R131.2 ; v1(1930,95) 1960,125 U104.3
  Bottom Layer w19.68: v1(1505,95) v1(1930,95)
NetR134_2: R134.2 R135.1 U104.5 | length 323.3
  Top Layer w19.68: R135.1 R134.2 1770,-20 U104.5
NetR136_2: R136.2 U105.1 | length 137.5
  Top Layer w19.68: R136.2 -333,-892 -315,-910 U105.1
NetR137_2: R137.2 R138.1 U105.3 | length 925.7
  Top Layer w19.68: v3(-355,-1095) -355,-1050 -315,-1010 U105.3 ; v3(85,-995) R137.2 164,-926 R138.1
  Bottom Layer w19.68: v3(-355,-1095) -285,-1165 35,-1165 85,-1115 v3(85,-995)
NetRELAY101_3: RELAY101.3 RELAY101.6 | length 315
  Top Layer w39.37: RELAY101.3 RELAY101.6
OVER: R132.1 U3.53 U104.7 | length 1816.6
  Top Layer w10: U104.7 2010,60 2035,85 2105,85 2130,60 2130,-260 2270,-400 2470,-400 2505,-435 v1(2505,-570) ; U3.53 2538.9,-968.9 2505,-935 2505,-885 2565,-825 R132.1
  Bottom Layer w10: v1(2505,-910) v1(2505,-570)
SGND: C109.2 C110.1 R139.2 U105.8 | length 1833.9
  Top Layer w19.68: C109.2 -416.85,-1213.94 ; -346.05,-1213.94 -421.05,-1213.94 -475,-1160 -475,-700 -365,-590 R139.2@-27,-590 ; -345,-1215 C110.1 ; U105.8 R139.2@-25,-592
SPI1_MISO: U3.22 U6.2 | length 583.5
  Top Layer w10: U6.2 2374.94,-1980.06 2420.79,-1934.21 U3.22
SPI1_MOSI: U3.23 U6.5 | length 689.9
  Top Layer w10: U3.23 2440.47,-1954.53 2380,-2015 2380,-2055 2405,-2080 U6.5
SPI1_NSS: U3.20 U6.1 | length 476.2
  Top Layer w10: U6.1 2250,-1895 2280,-1865 2335,-1865 2381.42,-1818.58 U3.20
SPI1_SCK: U3.21 U6.6 | length 656.1
  Top Layer w10: v1(2355,-1910) 2401.1,-1863.9 U3.21 ; v1(2420,-2030) U6.6
  Bottom Layer w10: v1(2355,-1910) 2355,-2000 2385,-2030 v1(2420,-2030)
SWCLK: SWD1.3 U3.49 | length 678.3
  Top Layer w10: U3.49 2617.64,-977.36 2675,-920 SWD1.3
SWDIO: SWD1.2 U3.46 | length 820.5
  Top Layer w10: U3.46 3213.27,-1211.73 3260,-1165 3260,-1060 3220,-1020 SWD1.2
USART2_RX: D3.1 R14.2 U3.17 | length 1593
  Top Layer w10: R14.2 2220,-1630 2309.53,-1540.47 U3.17 ; R14.2@2220,-1724 R14.2@2230,-1734 ; v1(3245,-1870) 3310,-1870 D3.1
  Bottom Layer w10: v1(2220,-1635) 2350,-1635 2400,-1685 2400,-1815 2465,-1880 3235,-1880 v1(3245,-1870)
USART2_TX: U3.16 U4.4 | length 1318.9
  Top Layer w10: v1(2150,-1675) 2150,-1615 2249.53,-1515.47 U3.16 ; v1(2975,-1955) 3010,-1990 U4.4
  Bottom Layer w10: v1(2150,-1675) 2150,-1760 2220,-1830 2365,-1830 2445,-1910 2930,-1910 v1(2975,-1955)
USART4_RX: R130.1 U3.52 U104.1 | length 1712.5
  Top Layer w10: U104.1 2135,205 2200,140 2200,-195 2340,-335 2485,-335 2565,-415 R130.1 2595,-705 2625,-735 2625,-860 2558.58,-926.42 U3.52
USART4_TX: R107.1 R108.1 U3.51 | length 471.2
  Top Layer w10: U3.51 2578.27,-951.73 2715,-815 R107.1 R108.1
VALVE: R121.1 U3.36 | length 2162
  Top Layer w10: U3.36 2761.42,-1408.58 v1(2795,-1375) ; v1(4605,-1125) R121.1
  Bottom Layer w10: v1(2795,-1375) 2860,-1375 2995,-1240 4490,-1240 v1(4605,-1125)
VCC_3.3V: C5.2 C6.2 C12.2 C13.2 C14.2 C15.2 C16.2 C17.2 C18.2 C19.2 C20.2 Q102.3 R14.1 R108.2 R130.2 R132.2 SWD1.1 U2.2 U2.4 U3.1 U3.13 U3.19 U3.32 U3.48 U3.64 U6.3 U6.7 U6.8 | length 7439
  Top Layer w10: R14.1@2230,-1802 2343,-1802 2361.73,-1783.27 2361.73,-1408.27 ; 2361.73,-1408.58 2181.42,-1408.58 2075,-1515 2075,-1645 2005,-1715 2005,-1760 1972,-1793 C13.2 1945,-1980 1995.06,-2030.06 2300.06,-2030.06 2328,-2058 C16.2 2555,-2170 2610,-2115 2610,-2000 2590,-1980 U6.7 U6.8 ; R132.2 R130.2 2495,-703 C14.2 2293.98,-704.02 C20.2 2195,-850 2322.36,-977.36 U3.64 2280.47,-1099.53 2249.53,-1130.47 U3.1 2307.36,-1172.36 2385,-1250 ; C18.2 2697,-1692 2617.64,-1612.64 2617.64,-1447.64 2578.27,-1408.27 2361.73,-1408.27 ; Q102.3 2795,-618.66 R108.2 2893,-697 v1(2895,-695) ; SWD1.1 3085,-1120 3037,-1072 2758,-1072 2690.47,-1139.53 U3.48 2582.64,-1172.36 2505,-1250 2385,-1250 ; 2361.73,-1408.27 2385,-1385 2385,-1250
  Top Layer w19.68: U2.4 1415,-1645 1563,-1793 C13.2
  Top Layer w39.37: C5.2@998,-1491.02 C6.2 1170,-1600 U2.2 U2.4
  Bottom Layer w10: v1(2895,-695) 3205,-695 3260,-750 3260,-1070 3210,-1120 SWD1.1
VCC_5V: C2.1 C3.2 C4.2 C9.1 D5.2 D6.2 D7.2 D9.2 D101.2 L1.2 P7.1 P7.2 Q2.3 R6.2 R18.2 RELAY1.7 RELAY2.7 RELAY3.7 RELAY4.7 RELAY101.7 U1.4 U2.3 U4.8 | length 12072.2
  Top Layer w10: R18.2 2963,-2438 2915,-2390 2915,-2135 2965,-2085 3165,-2085 3190,-2110 U4.8
  Top Layer w19.68: R6.2 1547,-2293.1 Q2.3 ; U4.8 3190,-2225 3245,-2280 3310,-2280 3340,-2310 C9.1 v2(3460,-2370) ; D5.2 3940,-1695 3965,-1720 3965,-1840 4050,-1925 4323.01,-1925 RELAY2.7 ; D6.2 4385,-1695 4416.67,-1726.67 4416.67,-1861.67 4485,-1930 4769.67,-1930 RELAY3.7 ; RELAY101.7 4640,-865 4730,-775 5105,-775 D101.2 5315,-830 v2(5320,-835) ; D7.2 4840,-1695 4868.33,-1723.33 4868.33,-1838.33 4965,-1935 5216.34,-1935 RELAY4.7 5320,-1730 5285,-1695 D9.2
  Top Layer w39.37: U1.4 471.93,-2766.93 510,-2805 935,-2805 998.78,-2741.22 998.78,-2281.22 C2.1 ; U2.3 1003,-1705 C4.2 998,-1818.98 1050,-1870.98 C2.1 ; Q2.3 1483.9,-2230 C2.1
  Bottom Layer w19.68: RELAY4.7 v2(5320,-835)
  Bottom Layer w39.37: C2.1 1825,-2230 2240,-2645 ; P7.1 2240,-2645 ; RELAY1.7 3831.34,-1965 3645,-1965 3460,-2150 3460,-2550 3365,-2645 2240,-2645
VCC_12V: C1.1 C109.1 D1.2 L101.2 R136.1 U1.1 U105.2 | length 3189.1
  Top Layer w19.68: v3(-415,-1045) -380,-1010 R136.1 U105.2 ; C109.1@-230,-1600 C109.1
  Top Layer w39.37: D1.2 40,-2375 95,-2430 95,-2581.34 190,-2676.34 U1.1 ; -400,-2375 -330,-2305 C1.1 -285,-2165 -285,-1665 C109.1 -54.68,-1765.31 L101.2
  Bottom Layer w19.68: v3(-415,-1045) -415,-1395 -220,-1590 C109.1
VCC_12V_IN: D1.1 P2.1 TVS1.2 | length 518.1
  Top Layer w39.37: D1.1 -265,-2560 TVS1.2 -255,-2665 -185,-2735 P2.1
VCC_29V: C102.1 C103.2 C104.2 R109.1 R131.1 R134.1 U101.2 U101.3 U101.6 U101.7 U103.4 U104.8 | length 2839.6
  Top Layer w19.68: U101.2 U101.3 985,95 1015,65 1015,-60 965,-110 R109.1 1131.21,-125 C103.2 1608,-138 R131.1 R134.1 1810,-200 2015,-200 v2(2060,-155) U104.8 ; U101.6 U101.7 1015,145 1050,180 C102.1 ; v2(2535,15) U103.4
  Bottom Layer w19.68: v2(2060,-155) 2365,-155 v2(2535,15)
VCC_38V: C101.2 C105.2 C107.2 C108.1 D102.2 R137.1 U101.1 U102.3 | length 5720.2
  Top Layer w19.68: R137.1 315,-995 D102.2 ; C101.2 568,237 610,195 U101.1 v2@680,355 ; C105.2 3685,338 U102.3
  Top Layer w39.37: C107.2 420,-457 420,-580 410,-590 C108.1 420,-870 360,-930 D102.2
  Bottom Layer w39.37: C108.1 420,90 740,410 3240,410 3565,85 U102.3
  other v2: 685,355
pads on no net: P3.1 P3.2 P7.4 P7.8 P7.9 RELAY1.2 RELAY1.5 RELAY2.2 RELAY2.5 RELAY3.2 RELAY3.5 RELAY4.2 RELAY4.5 RELAY101.2 RELAY101.5 U3.2 U3.3 U3.4 U3.14 U3.24 U3.33 U3.34 U3.37 U3.38 U3.39 U3.40 U3.45 U3.50 U3.54 U3.55 U3.56 U3.57 U3.58 U3.59 U3.61 U3.62 U101.5 U101.8 U103.12 U103.13 U103.14

## Polygon pours and split planes (outlines as drawn)
NetD2_2 on Top Layer "Top Layer-No Net" (hatched 90Degree grid 7.87 track 10, remove dead copper, pour order 1000): 320,-2905 300,-2905 300,-3140 315,-3155 330,-3170 915,-3170 1160,-3170 1235,-3095 1235,-2930 1230,-2930 1205,-2905 905,-2905 320,-2905
VCC_5V on Top Layer "Top Layer-No Net" (hatched 90Degree grid 7.87 track 10, remove dead copper, pour order 1001): 510,-2820 1060,-2820 1195,-2820 1225,-2790 1225,-2540 1225,-2190 1145,-2110 1005,-2110 995,-2110 955,-2150 950,-2155 950,-2295 950,-2410 950,-2435 920,-2465 905,-2480 750,-2480 705,-2480 680,-2505 660,-2525 660,-2660 660,-2720 630,-2750 595,-2785 510,-2785
VCC_12V on Top Layer "Top Layer-No Net" (hatched 90Degree grid 7.87 track 10, remove dead copper, pour order 1002): -230,-2375 -230,-1950 -180,-1900 -170,-1890 275,-1890 350,-1890 405,-1835 410,-1830 410,-1580 410,-1570 390,-1550 370,-1530 0,-1530 -270,-1530 -310,-1570 -315,-1575 -315,-1710 -390,-1785 -530,-1785 -610,-1785 -660,-1835 -670,-1845 -670,-2200 -670,-2325 -620,-2375
NetD102_1 on Top Layer "Top Layer-No Net" (hatched 90Degree grid 7.87 track 10, remove dead copper, pour order 1003): -135,-995 25,-995 40,-1010 40,-1030 40,-1050 55,-1065 60,-1070 215,-1070 435,-1070 465,-1100 470,-1105 470,-1380 470,-1390 425,-1435 -5,-1435 -45,-1435 -135,-1345
VCC_38V on Top Layer "Top Layer-No Net" (hatched 90Degree grid 7.87 track 10, remove dead copper, pour order 1004): 290,-1005 460,-1005 500,-965 505,-960 505,-565 505,-300 450,-245 310,-245 290,-265 290,-360 335,-405 335,-555 335,-865 290,-910
SGND on Top Layer "Top Layer-No Net" (hatched 90Degree grid 7.87 track 10, remove dead copper, pour order 1005): -360,-1545 -360,-1645 -360,-1655 -415,-1710 -425,-1720 -610,-1720 -615,-1720 -670,-1665 -670,-1305 -670,-660 -565,-555 -15,-555 -15,-920 -140,-920 -140,-855 -170,-825 -185,-810 -405,-810 -465,-810 -465,-1155 -415,-1205 -368.94,-1205 -360,-1213.94
VCC_12V_IN on Top Layer "Top Layer-No Net" (hatched 90Degree grid 7.87 track 10, remove dead copper, pour order 1007): -85,-2835 -625,-2835 -680,-2780 -680,-2505 -655,-2480 -645,-2470 -205,-2470 -185,-2490 -175,-2500 -175,-2600 -175,-2615 -140,-2650 -130,-2660 -85,-2660
GND on Top Layer "Top Layer-No Net" (hatched 90Degree grid 7.87 track 10, remove dead copper, pour order 1000): -175,-2320 -175,-2125 -175,-2060 -80,-1965 -70,-1955 425,-1955 530,-1955 600,-1885 600,-395 600,-305 480,-185 280,-185 235,-230 235,-290 235,-845 220,-860 215,-865 75,-865 55,-865 55,-755 55,-340 340,-55 360,-35 360,180 360,260 590,490 1010,490 4340,490 4465,365 4465,125 4465,-530 4595,-660 5210,-660 5315,-660 5415,-760 5415,-1700 5415,-3125 5320,-3220 1445,-3220 1360,-3135 1360,-2455 1360,-2160 1215,-2015 1195,-1995 935,-1995 875,-2055 875,-2290 875,-2375 830,-2420 825,-2425 170,-2425 165,-2425 60,-2320 -175,-2320
GND on Bottom Layer "Top Layer-No Net" (hatched 90Degree grid 7.87 track 10, remove dead copper, pour order 1001): -675,-660 -565,-550 -455,-550 -160,-550 105,-285 355,-35 355,260 510,415 590,495 1070,495 4345,495 4465,375 4470,370 4470,265 4470,-530 4580,-640 4595,-655 5255,-655 5315,-655 5405,-745 5420,-760 5420,-810 5420,-3125 5330,-3215 5320,-3225 5280,-3225 -475,-3225 -675,-3025 -675,-660

## Keep-outs
Keep-Out Layer:
  circle w10: c2.4,318.15 r55.12
  circle w10: c2.4,3.19 r78.74
  circle w10: c4726.81,370.51 r78.74
  lines w9.84: -720,-429.88 -391.3,-429.88 -391.3,503.07
  lines w10: -785,-495 cw(c-719.94,-494.94) -720,-429.88 ; -785,-494.88 -785,-3215 ccw(c-690.55,-3209.45) -685,-3303.9 5455,-3303.9 ccw(c5460.16,-3249.84) 5514.21,-3244.68 5514.21,-510 ccw(c5432.05,-512.05) 5430,-429.88 ; -391.3,505 cw(c-340.96,504.04) -340,554.37 5056.14,554.37 cw(c5063.39,497.76) 5120,505 ; 5120.51,-429.88 5434.09,-429.88 ; 5120.51,-429.49 5120.51,505

## Other copper
Top Layer:
  pour cut-out: 3387.29,310 4135.32,310 4135.32,-285 3387.29,-285

## Silkscreen, mask and mechanical layers (free items; w line width, h text height)
Top Overlay:
  circle w10: c1270.12,-508.62 r98.43
  circle w10: c1703.19,-508.62 r98.43
  circle w10: c1270.12,-941.69 r98.43
  circle w10: c1703.19,-941.69 r98.43
  text "+" at 5055,-3185 h30
  text "-" at 5255,-3185 h30
  text "+" at 4645,-3190 h30
  text "-" at 4845,-3190 h30
  text "A" at 3442.41,-3192.1 h30
  text "B" at 3647.41,-3192.1 h30
  text "+" at 3850,-3195 h30
  text "-" at 4050,-3195 h30
  text "+" at 4250,-3195 h30
  text "-" at 4450,-3195 h30
  text "5V" at 1580,-3235 h30 r90
  text "GND" at 1680,-3235 h30 r90
  text "TX" at 1785,-3235 h30 r90
  text "RX" at 1890,-3235 h30 r90
  text "5V" at 2260,-3235 h30 r90
  text "RX" at 2460,-3235 h30 r90
  text "TX" at 2565,-3235 h30 r90
  text "GND" at 2760,-3235 h30 r90
  text "rocket  20171129" at 370,-3250 h60

## Text inside footprints (layer, text, board x,y; h text height)
P7: Top Overlay "12" at 2820,-2985 h50; Top Overlay "1" at 2860,-3085 h50; Top Overlay "1" at 2820,-3085 h50; Top Overlay "1" at 2140,-3085 h50; Top Overlay "2" at 2140,-2985 h50
U2: Top Overlay "1" at 1348,-1499 h50 r270; Top Overlay "3" at 1348,-1679 h50 r270